# Altium PCB USBAutoMouse.PcbDoc
Units mm, origin at the board's own origin, x right, y up, seen from the top; angles counter-clockwise.
Board outline 34.02 x 58.01 mm, 2 copper layers (Top Layer, Bottom Layer); 43 components, 40 nets, 165 pads, 69 vias.
Unrouted connection lines stored in the file: 52.
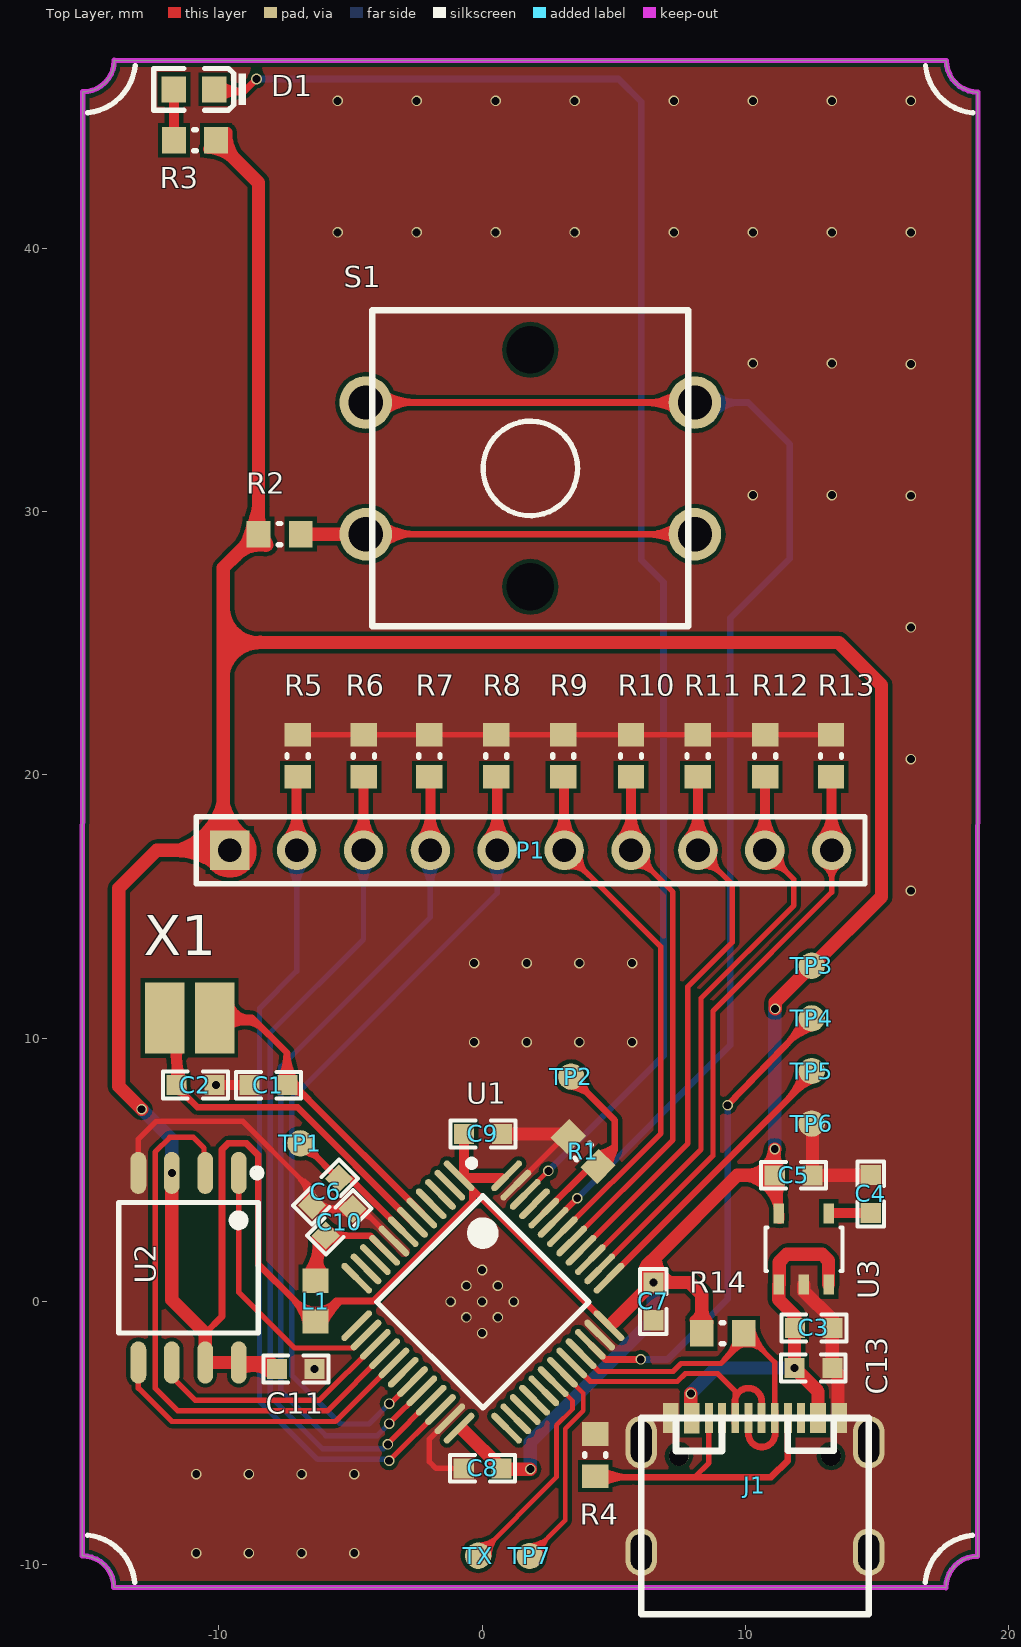
[diagram p0: Top Layer view]
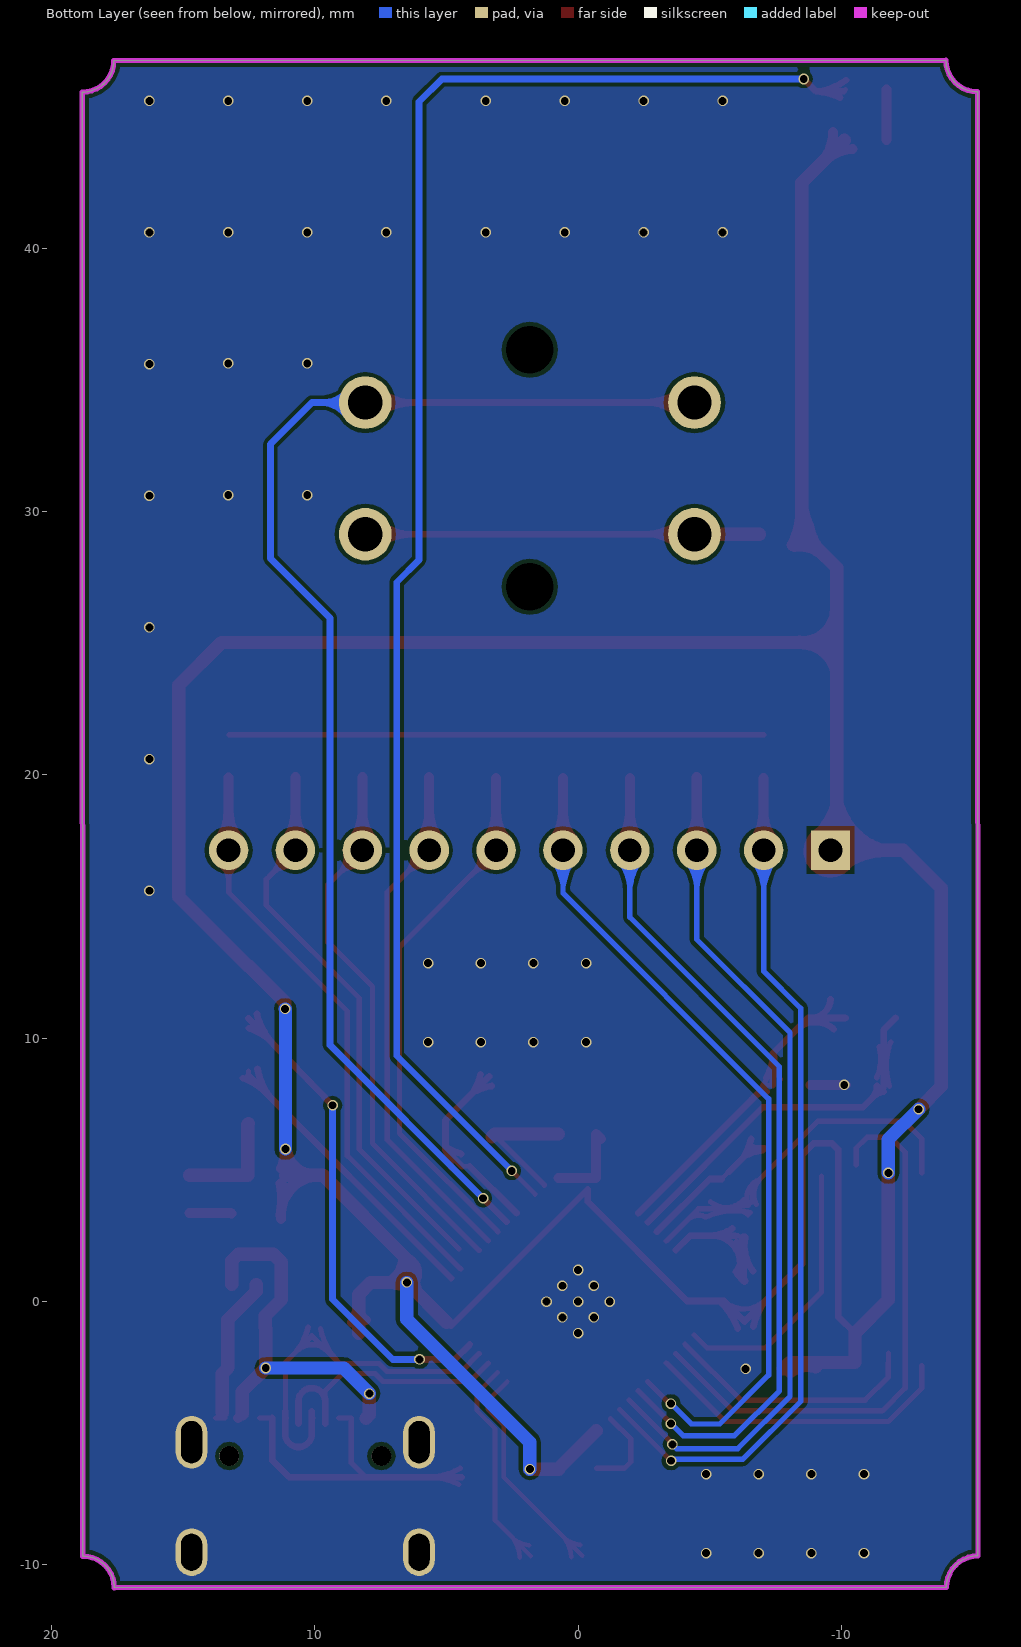
[diagram p1: Bottom Layer view, seen from below]

## Layer stack, top to bottom
Top Solder: solder mask 0.0102, Solder Resist, Dk 3.5
Top Layer: signal copper 0.0356
Dielectric 1: dielectric 0.32, FR-4, Dk 4.8
Bottom Layer: signal copper 0.0356
Bottom Solder: solder mask 0.0102, Solder Resist, Dk 3.5

## Board outline
-15.185,-9.658 cw(c-15.185,-10.858) -13.985,-10.858 17.615,-10.867 cw(c18.815,-10.867) 18.815,-9.667 18.83,45.933 cw(c18.83,47.133) 17.63,47.133 -13.97,47.142 cw(c-15.17,47.142) -15.17,45.942

## Design rules (kind name [scope] priority, off if disabled: settings)
Clearance [All] p1: gap=0.152 ignorepadtopadclearanceinfootprint=TRUE
DiffPairsRouting [All] p1: maxlimit=0.254 minlimit=0.152 mostfreqgap=0.178 toplayer_minwidth=0.152 toplayer_maxwidth=0.254 toplayer_prefwidth=0.178 bottomlayer_minwidth=0.152 bottomlayer_maxwidth=0.254 bottomlayer_prefwidth=0.178 maxuncoupledlength=12.7
MinimumSolderMaskSliver [All] p1: minsoldermaskwidth=0
PlaneConnect [All] p1: planeconnectstyle=Direct reliefexpansion=0.508 reliefentries=4 reliefconductorwidth=0.254 reliefairgap=0.254
PolygonConnect [All] p1: connectstyle=Direct reliefconductorwidth=0.254 reliefentries=4 polygonreliefangle="90 Angle" airgapwidth=0.254
RoutingVias [All] p1: holewidth=0.3 width=0.4 viastyle="Through Hole" minholewidth=0.3 minwidth=0.4 maxholewidth=0.5 maxwidth=0.6
SilkToSilkClearance [All] p1: silktosilkclearance=0
SilkToSolderMaskClearance [IsPad] p1: minsilkscreentomaskgap=0 clearancetoexposedcopper=TRUE
SolderMaskExpansion [All] p1: expansion=0.102
Width [All] p1: maxlimit=0.508 minlimit=0.178 preferedwidth=0.178
25 further rules are at their usual default settings.

## Classes and differential pairs
differential pair usb: +USB_DP -USB_DN

## Components (designator, comment, footprint, x,y, rotation, side; value= is the part's Value field where it differs from the comment)
C1 "15pF" "C 0603" -8.122,8.221 r0 top
C2 "15pF" "C 0603" -10.88,8.221 r180 top
C3 "1uF" "C 0603" 12.588,-1 r0 top
C4 "22nF" "C 0603" 14.758,4.08 r90 top
C5 "1uF" "C 0603" 11.837,4.794 r180 top
C6 "0.1uF" "C 0603" -5.943,4.169 r225 top
C7 "0.1uF" "C 0603" 6.503,0.016 r270 top
C8 "0.1uF" "C 0603" 0.026,-6.334 r180 top
C9 "0.1uF" "C 0603" 0.026,6.366 r0 top
C10 "0.1uF" "C 0603" -5.435,3.008 r45 top
C11 "0.1uF" "C 0603" -7.086,-2.557 r0 top
C13 "0.1uF" "C 0603" 12.588,-2.524 r180 top
D1 "红灯 0603" 0603_LED_S1 -10.936,46.038 r180 top
J1 "USB type C" TYPE-C-USB-17 10.694,-8.239 r0 top
L1 "4.7uH ±10%" 0603_L -6.324,0.016 r270 top
P1 "Header 10" HDR1X10 -9.585,17.142 r0 top
R1 "10K" 0603R 3.836,5.701 r315 top value=1K
R2 "4.7K" 0603R -7.692,29.147 r0 top value=1K
R3 "510" 0603R -10.906,44.108 r0 top value=1K
R4 "5.1K" 0603R 4.296,-5.828 r90 top value=1K
R5 "10K" 0603R -7.007,20.727 r270 top value=1K
R6 "10K" 0603R -4.492,20.727 r270 top value=1K
R7 "10K" 0603R -2.003,20.727 r270 top value=1K
R8 "10K" 0603R 0.537,20.727 r270 top value=1K
R9 "10K" 0603R 3.077,20.727 r270 top value=1K
R10 "10K" 0603R 5.655,20.727 r270 top value=1K
R11 "10K" 0603R 8.183,20.727 r270 top value=1K
R12 "10K" 0603R 10.748,20.727 r270 top value=1K
R13 "10K" 0603R 13.251,20.727 r270 top value=1K
R14 "1.5K" 0603R 9.135,-1.206 r0 top value=1K
S1 "KEY" KEY-12X12X7.5 1.83,31.642 r0 top locked
TP1 "NRST" TP -6.905,6.008 r0 top
TP2 "BOOT0" TP 3.38,8.545 r180 top
TP3 "3.3V" TP 12.516,12.756 r180 top
TP4 "SWDIO" TP 12.516,10.756 r180 top
TP5 "SWCLK" TP 12.516,8.756 r180 top
TP6 "GND" TP 12.516,6.756 r180 top
TP7 "RX" TP 1.804,-9.661 r90 top
TX "TX" TP -0.152,-9.652 r90 top (schematic designator TP8)
U1 "STM32F103C8T6" STM-LQFP48_L 0.026,-0.014 r315 top
U2 "W25Q32JVSSIQ" *SOIC127P790X216-8N -11.15,1.286 r270 top
U3 "RT9193-3.3v" SOT-23-5L 12.218,2 r90 top
X1 "8.000M 20pF" OSC_2SM_3R2x2R5 -11.106,10.77 r180 top

## Footprints (in the part's own frame and the unit in brackets; to place one, negate y for a bottom-side part, rotate by r counter-clockwise, add the part's x,y. Pads: shape width x height; smd on the part's side, far side on the other; paste and mask are expansions set on the pad)
0603_L [mm]
  rect 0.93x0.98 smd: 1(-0.77,0) 2(0.77,0)
  body extent -0.82,-0.41 0.83,0.41, height 0.46
0603_LED_S1 [mm]
  rect 0.93x0.98 smd: A(0.77,0) K(-0.77,0)
  silkscreen extent -1.98,-0.79 1.54,0.79, body extent -0.8,-0.4 0.8,0.4, height 0.6
0603R [mm] "Chip Resistor, Body 1.6x0.8mm, IPC Medium Density"
  rect 0.9x1 smd: 1(-0.8,0) 2(0.8,0)
  silkscreen extent -0.05,-0.4 0.05,0.4, body extent -0.85,-0.47 0.85,0.47, height 0.6
*SOIC127P790X216-8N [mm]
  oval 1.6x0.6 smd: 1(-3.6,1.905) 2(-3.6,0.635) 3(-3.6,-0.635) 4(-3.6,-1.905) 5(3.6,-1.905) 6(3.6,-0.635) 7(3.6,0.635) 8(3.6,1.905)
  silkscreen extent -3.82,-2.65 2.47,2.82
"C 0603" [mil]
  rect 30x30 smd: 1(-28,0) 2(28.5,-0.06)
  silkscreen extent -48,-20 49,20, body extent -31,-16 31,16, height 32
HDR1X10 [mm]
  rect 1.5x1.5 hole 0.9: 1(0,0)
  round 1.5 hole 0.9: 2(2.54,0) 3(5.08,0) 4(7.62,0) 5(10.16,0) 6(12.7,0) 7(15.24,0) 8(17.78,0) 9(20.32,0) 10(22.86,0)
  silkscreen extent -1.27,-1.27 24.13,1.27, body extent -1.27,-1.27 24.13,1.27, height 10.1
KEY-12X12X7.5 [mm]
  round 2 hole 1.3: 1(-6.25,2.5) 1(6.25,2.5) 2(-6.25,-2.5) 2(6.25,-2.5)
  round 0 hole 1.8: ""(0,-4.5) ""(0,4.5)
  silkscreen extent -6,-6 6,6, body extent -6.52,-5.98 6.58,5.92, height 7.3
OSC_2SM_3R2x2R5 [mm] "Crystal 8M Hz 3.2x2.5mm SMD"
  rect 1.5x2.7 smd: 1(-0.95,0) 2(0.95,0)
  body extent -1.6,-1.25 1.6,1.25, height 1
SOT-23-5L [mil]
  rect 30x16 smd: 1(-53.15,37.4) 2(-53.15,0) 3(-53.15,-37.4) 4(53.15,-37.4) 5(53.15,37.4)
  silkscreen extent -33,-58 32,57, body extent -34,-59 34,59, height 57
STM-LQFP48_L [mm] "QFP, 48-Leads, Body 7x7mm, Pitch 0.5mm, IPC High Density"
  oval 1.55x0.25 smd: 1(-4.025,2.75) 2(-4.025,2.25) 3(-4.025,1.75) 4(-4.025,1.25) 5(-4.025,0.75) 6(-4.025,0.25) 7(-4.025,-0.25) 8(-4.025,-0.75) 9(-4.025,-1.25) 10(-4.025,-1.75) 11(-4.025,-2.25) 12(-4.025,-2.75) 25(4.025,-2.75) 26(4.025,-2.25) 27(4.025,-1.75) 28(4.025,-1.25) 29(4.025,-0.75) 30(4.025,-0.25) 31(4.025,0.25) 32(4.025,0.75) 33(4.025,1.25) 34(4.025,1.75) 35(4.025,2.25) 36(4.025,2.75)
  oval 0.25x1.55 smd: 13(-2.75,-4.025) 14(-2.25,-4.025) 15(-1.75,-4.025) 16(-1.25,-4.025) 17(-0.75,-4.025) 18(-0.25,-4.025) 19(0.25,-4.025) 20(0.75,-4.025) 21(1.25,-4.025) 22(1.75,-4.025) 23(2.25,-4.025) 24(2.75,-4.025) 37(2.75,4.025) 38(2.25,4.025) 39(1.75,4.025) 40(1.25,4.025) 41(0.75,4.025) 42(0.25,4.025) 43(-0.25,4.025) 44(-0.75,4.025) 45(-1.25,4.025) 46(-1.75,4.025) 47(-2.25,4.025) 48(-2.75,4.025)
  silkscreen extent -4.15,-2.85 2.85,3.55, body extent -3.5,-3.5 3.5,3.5, height 1.6
TP [mm] "Testpoint, Surface Mounting, Circular, Pad Diameter 1mm"
  round 1 smd: 1(0,0)
TYPE-C-USB-17 [mm]
  oval 1.2x1.8 hole 0.8 slot 1.4 at 90 deg: 0(-4.653,-1.278) 0(3.987,-1.278)
  oval 1.2x2 hole 0.8 slot 1.6 at 90 deg: 0(-4.653,2.902) 0(3.987,2.902)
  rect 0.3x1.15 smd: A1(-3.683,3.815) A4(-2.883,3.813) A5(-1.583,3.817) A6(-0.583,3.817) A7(-0.083,3.815) A8(-2.083,3.817) A9(2.217,3.817) A12(3.017,3.817) B1(2.717,3.817) B4(1.917,3.817) B5(1.417,3.817) B6(0.417,3.817) B7(-1.083,3.815) B8(0.917,3.817) B9(-2.583,3.813) B12(-3.383,3.815)
  round 0.75 hole 0.75 unplated: ""(-3.223,2.372) ""(2.557,2.372)
  silkscreen extent -4.65,-3.63 3.99,3.82

## Part data
C1 C2 C3 C4 C5 C6 C7 C8 C9 C10 C11 C13: library part C, "无极性贴片电容", BOM名称=无极性, 学习资源=www.ooocke.
D1: library part "0603 红灯", "发光二极管", Package=0603, SuppliersPartNumber=C2286, ComponentLink1Description=供应商, ComponentLink1URL=http://www.szlcsc.com/product/details_2659.html, Supplier=LC
J1: library part USB_C
L1: library part "0603 4.7uH 10%", "贴片电感", Package=0603, SuppliersPartNumber=C1034, ComponentLink1Description=供应商, ComponentLink1URL=http://www.szlcsc.com/product/details_1386.html, Supplier=LC
P1: "Header, 10-Pin", LatestRevisionDate=17-Jul-2002, LatestRevisionNote="Re-released for DXP Platform.", Publisher="Altium Limited"
R1 R2 R3 R4 R5 R6 R7 R8 R9 R10 R11 R12 R13 R14: library part Res1, "Resistor", Ordered by=Subcon, Published=8-Jun-2000, Publisher="Altium Limited", Revision="July-2002: Re-released for DXP Platform."
S1: "普通轻触按钮"
TP1 TP2 TP3 TP4 TP5 TP6 TP7 TX: library part TP
U1: "ARM Cortex-M3 32-bit MCU, 64 KB Flash, 20 KB Internal RAM, 37 I/Os, 48-pin LQFP, -40 to 85 degC, Tray", I/Os (High Current)=37, Operating Frequency(F) (Processor speed) (MHz)=72, Supplier Part Number 1=497-6063-ND, Supply Voltage(Vcc) min (V)=2, A/D Converter="2x12-bit (10 Channel)", ComponentLink1Description="Manufacturer URL", ComponentLink1URL=http://www.st.com/web/en/home.html, ComponentLink2Description=Datasheet, ComponentLink2URL=http://www.st.com/st-web-ui/static/active/en/resource/technical/document/datasheet/CD00161566.pdf, ComponentLink3Description="Package Specification", ComponentLink3URL=http://www.st.com/st-web-ui/static/active/en/resource/technical/document/datasheet/DM00058181.pdf, Core="ARM Cortex-M3", DatasheetVersion="Rev. 16", FLASH Size (Prog) (kB)=64, Internal RAM Size (kB)=20, Mounting Technology="Surface Mount", PackageDescription="48-Pin Low Profile Quad Flat Package, 7 x 7 mm Body, 0.5 mm Pitch", PackageReference=LQFP48, PackageVersion="Rev. 6, 06/2013", Packing=Tray, PartNumber=STM32F103C8T6, Supplier 1=Digi-Key, Supplier 2=Farnell, Supplier 3=Newark, Supplier 4=Newark, Supplier 5=Mouser, Supplier Part Number 2=1447637, Supplier Part Number 3=59M2182, Supplier Part Number 4=57P1222, Supplier Part Number 5=511-STM32F103C8T6
U2: "NORé—ªå­˜ä¸²è¡ŒSPI 3V 32Mbit 32M x 1ä½?å¼•è„šSOIC", Package="SOIC-8 Winbond", Availability=Unavailable, MF=Winbond, MP=W25Q32JVSSIQ, Price=None, SnapEDA_Link=https://www.snapeda.com/parts/W25Q32JVSSIQ/Winbond%20Electronics/view-part/?ref=snap
U3: library part RT9193
X1: library part XTAL, "Crystal Oscillator", LatestRevisionDate=17-Jul-2002, LatestRevisionNote="Re-released for DXP Platform.", PackageReference=R38, Published=8-Jun-2000, Publisher="Altium Limited"

## Via types
v1: diameter 0.4, hole 0.3, Top Layer to Bottom Layer, tented both sides, 69 vias

## Nets (pads, with @x,y where several pads share a name; then routed paths per layer and width w, separated by ;. In a path a pad name is that pad's centre, name@x,y a point inside that pad or via, vN(x,y) a via of type N, cw(c..) or ccw(c..) an arc to the next point about the centre after c; other vN are vias at no path point)
3.3V: C5.2 C7.1 C8.1 C9.1 C11.1 L1.2 P1.1 R2.1 R3.2 R14.1 TP3.1 U1.1 U1.24 U1.36 U1.48 U2.3 U2.7 U2.8 U3.5 | length 202
  Top Layer w0.203: -9.867,23.559 cw(c-8.424,23.488) -9.826,23.835 ; -8.683,25.033 ccw(c-8.429,26.328) -8.617,25.021 ccw(c-8.429,26.328) -8.175,25.033 ; -7.124,0.067 ccw(c-6.313,0.834) -5.547,0.023
  Top Layer w0.254: -10.515,-1.203 -9.877,-0.565 -9.877,5.779 -9.648,6.008 -8.942,6.008 -8.505,5.571 -8.505,1.427 -7.108,0.03 ; L1.2@-6.65,-0.955 ccw(c-9.129,-1.508) -7.108,0.03 ; L1.2@-6.067,-1.02 cw(c-3.282,-2.118) -5.374,0.023 ; U1.36 -0.365,4.266 -0.365,3.796 -4.137,0.023 -5.374,0.023 ; 6.196,0.248 cw(c7.056,-0.729) 6.97,0.57 ; C5.2@10.875,4.535 cw(c8.683,3.252) 11.129,3.935 cw(c8.683,3.252) U3.5@11.219,3.111 ; C5.2 v1(11.113,5.795) ; 11.129,4.408 11.154,4.382 ; -7.108,0.03 L1.2 -5.547,0.023 -5.374,0.023
  Top Layer w0.381: -11.626,17.171 ccw(c-12.339,19.608) -9.826,19.241 ; -11.58,17.146 cw(c-11.719,14.61) -11.527,17.142 P1.1 P1.1@-9.826,17.383 ; -11.452,17.057 cw(c-11.644,14.524) P1.1@-10.149,16.577 ; R3.2@-10.412,43.773 cw(c-10.509,42.161) -9.277,43.205 ; -9.817,19.088 ccw(c-7.322,19.568) P1.1@-9.174,17.829 ; R3.2@-9.677,44.425 ccw(c-8.121,44.372) -8.985,43.076 ; -9.409,28.277 ccw(c-11.242,30.036) -9.327,28.367 ccw(c-11.242,30.036) -8.761,29.493 ccw(c-11.065,30.561) -8.531,30.722 ; C9.1@-0.875,6.176 C9.1 -0.685,4.699 U1.48@0.737,4.699 ; 6.1,0.42 ccw(c5.386,0.799) C7.1@6.193,0.754 ; C7.1@6.147,1.07 cw(c5.386,0.799) C7.1@6.193,0.754 ; C7.1@6.322,0.59 cw(c6.759,1.067) C7.1@6.193,0.754 ; 6.582,1.69 ccw(c6.759,1.067) C7.1@6.193,0.754 ; 6.644,1.714 ccw(c7.659,1.664) 7.265,0.727 ccw(c7.659,1.664) 7.288,0.718 ; R14.1@8.065,-0.706 ccw(c7.749,-0.252) 8.284,-0.393 ; 8.386,-0.266 ccw(c9.642,-0.08) R14.1@8.595,-0.799 ; 9.959,4.757 cw(c9.771,3.244) 11.129,3.935 cw(c9.771,3.244) U3.5@11.258,3.577 ; v1@11.148,5.823 ccw(c12.408,5.661) C5.2@11.288,5.062 ; U3.5@11.267,3.515 cw(c13.778,3.897) U3.5@11.258,3.577 ; U3.5@11.291,3.136 ccw(c9.771,3.244) U3.5@11.258,3.577 ; C5.2@11.307,4.484 ccw(c13.778,3.897) U3.5@11.258,3.577
  Top Layer w0.508: v1(-12.93,7.303) -13.798,8.171 -13.798,15.697 -12.353,17.142 -11.527,17.142 ; v1(-11.785,4.886) -11.785,0.067 -10.515,-1.203 U2.7 U2.8 -8.04,-2.314 C11.1 ; -10.766,17.235 ccw(c-12.128,19.379) -9.867,18.222 ; P1.1@-10.251,16.763 ccw(c-9.576,17.116) P1.1@-9.684,17.87 ; R3.2 -8.492,42.495 -8.492,29.766 ; P1.1@-9.826,17.383 -9.826,19.241 -9.826,23.835 -9.826,25.033 ; -9.826,26.303 ccw(c-8.507,26.347) -8.761,25.052 ; -9.819,23.964 cw(c-8.424,23.59) -8.617,25.021 cw(c-8.424,23.59) -8.495,25.033 ; -9.409,28.277 -9.339,28.347 ; -9.373,28.31 cw(c-8.439,27.51) -9.339,28.347 ; -9.327,28.367 -9.826,27.868 -9.826,25.033 ; U2.8@-9.033,-2.48 cw(c-8.695,-3.438) C11.1@-8.061,-2.644 ; R2.1@-8.516,29.171 -9.277,28.41 ; R2.1 -8.492,29.766 ; -8.492,30.214 ccw(c-5.962,29.99) -8.492,29.766 ; R2.1@-8.218,28.719 ccw(c-8.439,27.51) -9.277,28.41 ; R2.1@-8.171,28.736 cw(c-5.962,29.99) -8.492,29.766 ; -0.696,-4.901 C8.1 ; C8.1@0.737,-6.362 v1(1.833,-6.362) ; 4.984,-0.793 v1(6.503,0.727) ; R14.1 8.335,0.267 7.875,0.727 7.265,0.727 v1(6.503,0.727) ; 9.986,4.796 ccw(c10.05,5.859) 10.114,4.796 ; C5.2 10.114,4.796 ; v1(11.113,5.795) cw(c10.05,5.859) 10.114,4.796 ; v1(11.13,11.113) 11.13,11.37 TP3.1 12.543,12.756 15.168,15.381 15.168,23.407 13.542,25.033 -8.175,25.033 -8.353,25.033 ; -9.826,25.033 -8.683,25.033 -8.495,25.033 ; -9.339,28.347 cw(c-8.439,27.51) -9.277,28.41 ; -9.339,28.347 -9.277,28.41 ; -8.495,25.033 cw(c-8.424,23.59) -8.353,25.033 ; -8.495,25.033 -8.353,25.033 ; v1(6.503,0.727) 6.503,1.611 6.582,1.69 9.688,4.796 10.114,4.796
  Bottom Layer w0.508: v1(-12.93,7.303) -11.785,6.158 v1(-11.785,4.886) ; v1(1.833,-6.362) 1.833,-5.346 6.503,-0.675 v1(6.503,0.727) ; v1(11.113,5.795) 11.113,11.097 v1(11.13,11.113)
5V: C3.1 C13.2 J1.A4 J1.A9 J1.B4 J1.B9 U3.1 U3.3 | length 14.9
  Top Layer w0.381: U3.1 U3.1@11.281,0.663 ; J1.B4@12.755,-4.266 J1.A9 ; U3.3@13.156,0.663 U3.3
  Top Layer w0.508: v1(7.929,-3.492) 7.929,-4.3 J1.B9@8.055,-4.427 ; U3.1 11.268,0.077 11.877,-0.532 C3.1 11.865,-1.013 v1(11.865,-2.522) 12.755,-3.412 J1.B4@12.755,-4.266 ; U3.1@11.281,0.663 11.281,1.504 11.57,1.794 12.911,1.794 13.156,1.55 U3.3@13.156,0.663
  Bottom Layer w0.508: v1(7.929,-3.492) 8.898,-2.522 v1(11.865,-2.522)
BOOT0: R1.2 TP2.1 U1.44 | length 9.9
  Top Layer w0.178: R1.2@4.115,5.135 R1.2
  Top Layer w0.254: U1.44 R1.2@4.115,5.135 ; TP2.1@3.278,8.188 cw(c2.837,5.687) 3.95,7.97 ; TP2.1 3.986,7.938 ; TP2.1@3.707,8.623 ccw(c6.174,9.228) 3.986,7.938 ; R1.2 5.033,5.766 ; R1.2@4.441,5.608 ccw(c3.701,8.038) 4.957,5.83 ; R1.2@4.814,5.112 cw(c7.31,4.641) 5.033,5.766 ; 3.986,7.938 5.033,6.892 5.033,5.766
CC: J1.A5 J1.A8 J1.B5 J1.B8 R4.1 | length 15
  Top Layer w0.178: J1.A8 J1.A5 ; J1.B8 J1.B5
  Top Layer w0.203: R4.1@4.481,-6.336 ccw(c5.736,-4.128) 5.684,-6.667 ; R4.1@4.537,-6.946 cw(c5.702,-9.203) 5.566,-6.667 ; 5.82,-6.667 cw(c5.736,-4.128) 5.789,-6.667 ; 8.075,-6.667 8.611,-6.131 J1.A8 ; 5.684,-6.667 ccw(c5.736,-4.128) 5.789,-6.667 ; 5.684,-6.667 5.789,-6.667
  Top Layer w0.254: R4.1@4.423,-6.667 5.684,-6.667 ; 5.789,-6.667 8.075,-6.667 10.976,-6.667 11.611,-6.033 J1.B8
F_CS: U1.14 U2.1 | length 10.3
  Top Layer w0.203: U2.1@-9.245,4.759 -9.245,0.359 -7.124,-1.762 -4.903,-1.762 U1.14
GND: C1.1 C2.1 C3.2 C4.2 C5.1 C6.2 C7.2 C8.2 C9.2 C10.2 C11.2 C13.1 J1.0 J1.A1 J1.A12 J1.B1 J1.B12 R1.1 R4.2 R5.1 R6.1 R7.1 R8.1 R9.1 R10.1 R11.1 R12.1 R13.1 TP6.1 U1.8 U1.23 U1.35 U1.47 U2.4 U3.2 | length 60.6
  Top Layer w0.203: U2.4 -13.055,6.173 -12.381,6.846 -9.089,6.846 -6.87,4.627 ; R5.1@-7.057,21.527 R5.1 R6.1 R7.1 R8.1 R9.1 R10.1 R11.1 R12.1 R13.1 ; C6.2@-6.764,3.699 ccw(c-7.502,4.079) -6.884,4.632 cw(c-7.157,3.931) -6.87,4.627 ; C6.2@-6.537,3.381 cw(c-5.945,0.911) C10.2@-4.873,3.214 ; C6.2@-6.452,3.299 cw(c-5.791,2.489) -5.685,3.53 ; C6.2@-6.295,3.874 ccw(c-5.622,4.471) C10.2@-5.025,3.798 ; C10.2@-4.831,3.221 cw(c-4.576,2.661) -4.187,3.138 ; U1.8 -4.568,3.519 C10.2 -5.979,3.519 -6.118,3.658 C6.2 ; U1.23 -2.003,-5.225 -2.003,-6.082 -1.753,-6.332 C8.2 ; U1.47 3.125,6.266 R1.1 ; J1.B1 J1.A12 J1.A12@13.766,-4.422 ; -6.87,4.627 cw(c-7.157,3.931) C6.2 ; -6.87,4.627 -6.626,4.382 -6.626,3.828 C6.2
  Top Layer w0.381: C2.1 C1.1
  Top Layer w0.508: C9.2 3.173,6.364 R1.1 ; U3.2 12.218,0.398 13.312,-0.697 C3.2 13.3,-1.014 C13.1 13.517,-2.741 J1.B1@13.517,-4.228 ; TP6.1 12.548,6.724 C5.1 14.75,4.794 C4.2
  other v1: -10.858,-9.553 -8.858,-9.553 -6.858,-9.553 -4.858,-9.553 -10.858,-6.553 -8.858,-6.553 -6.858,-6.553 -4.858,-6.553 -6.362,-2.558 0,-1.2 -0.6,-0.6 0.6,-0.6 -1.2,0 0,0 1.2,0 -0.6,0.6 0.6,0.6 0,1.2 -10.109,8.23 -0.305,9.855 1.695,9.855 3.695,9.855 5.695,9.855 -0.305,12.855 1.695,12.855 3.695,12.855 5.695,12.855 16.285,15.603 16.285,20.603 16.285,25.603 16.285,30.603 10.285,30.63 13.285,30.63 16.285,35.603 10.285,35.63 13.285,35.63 -5.491,40.603 -2.491,40.603 0.509,40.603 3.509,40.603 7.285,40.603 10.285,40.603 13.285,40.603 16.285,40.603 -5.491,45.603 -2.491,45.603 0.509,45.603 3.509,45.603 7.285,45.603 10.285,45.603 13.285,45.603 16.285,45.603
MISO: U1.16 U2.2 | length 21.8
  Top Layer w0.203: U2.2@-10.563,5.195 -10.563,5.83 -10.969,6.237 -11.858,6.237 -12.42,5.675 -12.42,-3.286 -11.556,-4.15 -5.877,-4.15 U1.16
MOSI: U1.17 U2.5 | length 12
  Top Layer w0.203: U2.5@-13.055,-2.441 -13.055,-3.286 -11.785,-4.556 -5.576,-4.556 U1.17
NetC1_2: C1.2 U1.5 X1.1 | length 18.2
  Top Layer w0.178: C1.2 C1.2@-7.147,8.219
  Top Layer w0.203: C1.2@-7.674,8.441 ccw(c-9.988,9.487) -7.448,9.492 ; -7.382,9.3 ccw(c-4.866,9.646) C1.2@-7.124,8.484 ; -7.27,8.738 ccw(c-4.867,9.56) -6.624,7.726
  Top Layer w0.254: X1.1 -8.738,10.77 -7.398,9.43 C1.2 ; X1.1@-9.709,10.338 cw(c-9.01,9.614) -8.286,10.312 ; X1.1@-9.585,11.481 ccw(c-8.84,11.515) -8.806,10.77 ; C1.2@-7.159,7.966 cw(c-7.172,7.248) -6.773,7.845 ; C1.2@-7.147,8.219 -6.773,7.845 ; -6.594,7.674 ccw(c-7.172,7.248) -6.773,7.845 ; U1.5 -6.773,7.845
NetC2_2: C2.2 U1.6 X1.2 | length 17.6
  Top Layer w0.203: X1.2@-11.868,9.855 cw(c-14.243,8.957) C2.2@-11.825,8.182 ; X1.2@-11.435,9.673 ccw(c-9.76,9.225) C2.2@-11.337,8.504
  Top Layer w0.254: X1.2 -11.604,10.318 C2.2 ; C2.2@-11.629,8.192 -11.249,7.812 ; C2.2@-11.603,7.966 cw(c-11.623,7.436) -11.249,7.812 ; C2.2@-11.35,8.192 ccw(c-10.731,8.179) -11.219,7.798 ; U1.6 -7.014,7.38 -10.817,7.38 -11.249,7.812
NetC4_1: C4.1 U3.4 | length 1.6
  Top Layer w0.381: U3.4 13.178,3.359 14.749,3.359 C4.1
NetD1_A: D1.A R3.1 | length 1.9
  Top Layer w0.381: R3.1 D1.A
NetR2_2: R2.2 S1.2 | length 20.2
  Top Layer w0.203: R2.2 R2.2@-6.887,29.142 ; S1.2@-3.984,28.548 cw(c-2.319,26.629) -2.689,29.142 ; S1.2@-3.673,29.476 ccw(c-2.467,31.712) -2.536,29.173 ; 6.278,29.117 cw(c6.209,26.578) S1.2@7.414,28.814 ; 6.43,29.147 ccw(c6.061,31.66) S1.2@7.726,29.742
  Top Layer w0.254: S1.2@-4.42,29.142 S1.2@8.08,29.142
  Top Layer w0.508: R2.2@-6.887,29.142 S1.2@-4.42,29.142
NRST: C6.1 TP1.1 U1.7 | length 6.9
  Top Layer w0.178: TP1.1@-7.086,5.858 TP1.1@-6.653,5.858 ; C6.1@-5.721,4.926 C6.1@-5.453,4.658
  Top Layer w0.254: TP1.1@-7.004,5.75 cw(c-7.445,3.249) -6.331,5.531 ; TP1.1@-6.653,5.858 -6.295,5.5 ; TP1.1@-6.574,6.185 ccw(c-4.107,6.79) -6.295,5.5 ; C6.1@-5.721,4.926 -6.295,5.5 ; C6.1@-5.453,4.658 -5,4.658 U1.7
PA8: U1.29
PA9: TX.1 U1.30 | length 9.7
  Top Layer w0.178: TX.1 2.823,-6.677 2.823,-4.696 3.433,-4.087 3.433,-3.775 U1.30 ; TX.1@-0.083,-9.245 ccw(c-0.308,-7.825) 0.461,-9.039 ; TX.1@0.261,-9.703 cw(c1.711,-9.796) 0.486,-9.014
PA10: TP7.1 U1.31 | length 9.5
  Top Layer w0.178: TP7.1 3.153,-8.312 3.153,-4.833 3.839,-4.147 3.839,-3.474 U1.31 ; TP7.1@1.868,-9.259 ccw(c1.643,-7.839) 2.411,-9.054 ; TP7.1@2.211,-9.717 cw(c3.661,-9.811) 2.437,-9.029
PA13: TP4.1 U1.34 | length 20.6
  Top Layer w0.254: U1.34 4.683,-2.196 v1(6.024,-2.196) ; v1(9.326,7.457) TP4.1 ; 11.584,9.793 ccw(c9.732,11.53) TP4.1@12.199,10.926 ; 11.698,9.928 cw(c13.319,7.972) TP4.1@12.501,10.377
  Bottom Layer w0.254: v1(6.024,-2.196) 7.04,-2.196 9.326,0.09 v1(9.326,7.457)
PA14: TP5.1 U1.37 | length 13.6
  Top Layer w0.178: TP5.1@12.516,8.587 TP5.1
  Top Layer w0.254: U1.37 TP5.1@12.516,8.587 ; 11.643,7.712 cw(c13.611,6.105) TP5.1@12.724,8.486 ; 11.713,7.784 ccw(c9.681,9.307) TP5.1@12.176,8.833
PA15: P1.10 R13.2 U1.38 | length 25.9
  Top Layer w0.178: U1.38 U1.38@4.463,1.254 ; R13.2 R13.2@13.275,19.904
  Top Layer w0.203: U1.38 8.767,5.544 8.767,11.037 13.275,15.545 P1.10 ; P1.10@12.947,16.564 cw(c12.594,15.962) 13.275,16.117 ; 13.275,16.009 cw(c13.913,16.021) P1.10@13.644,16.6
  Top Layer w0.381: P1.10@12.902,17.6 ccw(c11.758,18.587) 13.266,18.492 ; P1.10 R13.2@13.275,19.904 ; 13.275,18.606 ccw(c15.003,18.606) P1.10@13.718,17.451
PB0: U1.18
PB1: P1.5 R8.2 U1.19 | length 36.2
  Top Layer w0.203: v1(-3.527,-3.873) -3.478,-3.873 U1.19 ; R8.2 R8.2@0.575,19.89
  Top Layer w0.381: P1.5@0.202,17.574 ccw(c-0.942,18.562) 0.566,18.467 ; P1.5 0.575,18.581 ; R8.2@0.575,19.89 0.575,18.581 ; P1.5@1.018,17.425 cw(c2.303,18.581) 0.575,18.581
  Bottom Layer w0.203: v1(-3.527,-3.873) -4.302,-4.648 -5.378,-4.648 -7.235,-2.791 -7.235,7.7 0.575,15.51 0.575,15.822 ; P1.5@0.242,16.703 cw(c-2.075,15.355) 0.575,15.762 ; 0.574,15.818 cw(c2.764,15.508) 0.575,15.822 ; P1.5 0.575,15.822 ; P1.5@0.918,16.727 ccw(c2.764,15.508) 0.575,15.822
PB2: P1.4 R7.2 U1.20 | length 36.7
  Top Layer w0.178: R7.2 R7.2@-1.965,19.89
  Top Layer w0.203: v1@-3.53,-4.631 U1.20
  Top Layer w0.381: P1.4@-2.338,17.549 ccw(c-3.482,18.537) -1.974,18.441 ; P1.4 -1.965,18.556 ; R7.2@-1.965,19.89 -1.965,18.556 ; P1.4@-1.522,17.4 cw(c-0.237,18.556) -1.965,18.556
  Bottom Layer w0.203: v1(-3.527,-4.635) -3.984,-5.092 -5.94,-5.092 -7.642,-3.39 -7.642,8.919 -1.965,14.595 -1.965,15.796 ; P1.4@-2.298,16.678 cw(c-4.615,15.329) -1.965,15.736 ; -1.966,15.793 cw(c0.224,15.483) -1.965,15.796 ; P1.4 -1.965,15.796 ; P1.4@-1.622,16.701 ccw(c0.224,15.483) -1.965,15.796
PB3: P1.9 R12.2 U1.39 | length 25.6
  Top Layer w0.203: U1.39@4.525,1.995 8.31,5.779 8.31,11.52 11.84,15.05 11.84,16.037 P1.9 ; R12.2@10.735,19.914 R12.2 ; P1.9@10.738,16.491 cw(c10.982,15.614) 11.688,16.189 ; P1.9@11.389,17.138 ccw(c12.219,16.885) 11.55,16.331
  Top Layer w0.381: P1.9@10.362,17.574 ccw(c9.218,18.562) 10.726,18.467 ; P1.9 R12.2@10.735,19.914 ; 10.735,18.581 ccw(c12.463,18.581) P1.9@11.178,17.425
PB4: P1.8 R11.2 U1.40 | length 25.1
  Top Layer w0.203: U1.40 7.811,6.003 7.811,11.961 9.503,13.653 9.503,15.834 P1.8 ; R11.2 R11.2@8.195,19.915 ; P1.8@8.198,16.491 cw(c8.442,15.614) 9.148,16.189 ; P1.8@8.849,17.138 ccw(c9.679,16.885) 9.01,16.331
  Top Layer w0.381: P1.8@7.822,17.574 ccw(c6.678,18.562) 8.186,18.467 ; P1.8 R11.2@8.195,19.915 ; 8.195,18.581 ccw(c9.923,18.581) P1.8@8.638,17.425
PB5: P1.7 R10.2 U1.41 | length 24
  Top Layer w0.203: U1.41 7.243,6.142 7.243,15.554 P1.7 ; P1.7@5.654,16.495 cw(c5.898,15.618) 6.604,16.193 ; P1.7@6.304,17.142 ccw(c7.135,16.889) 6.466,16.335
  Top Layer w0.381: P1.7@5.282,17.574 ccw(c4.138,18.562) 5.646,18.467 ; P1.7 R10.2 ; 5.655,18.581 ccw(c7.383,18.581) P1.7@6.098,17.425
PB6: P1.6 R9.2 U1.42 | length 24.5
  Top Layer w0.203: U1.42 6.786,6.391 6.786,13.471 P1.6 ; R9.2 R9.2@3.115,19.89 ; P1.6@3.113,16.486 cw(c3.357,15.609) 4.062,16.185 ; P1.6@3.763,17.133 ccw(c4.594,16.88) 3.925,16.327
  Top Layer w0.381: P1.6@2.742,17.574 ccw(c1.598,18.562) 3.106,18.467 ; P1.6 R9.2@3.115,19.89 ; 3.115,18.581 ccw(c4.843,18.581) P1.6@3.558,17.425
PB7: S1.1 U1.43 | length 57.9
  Top Layer w0.203: S1.1@-3.984,33.548 cw(c-2.319,31.629) -2.689,34.142 ; S1.1@-3.673,34.476 ccw(c-2.467,36.712) -2.536,34.173 ; 6.227,34.112 cw(c6.158,31.573) S1.1@7.363,33.809 ; 6.379,34.142 ccw(c6.01,36.655) S1.1@7.675,34.737
  Top Layer w0.254: S1.1@-4.42,34.142 S1.1@8.08,34.142 ; U1.43@2.719,3.034 v1(3.611,3.925)
  Bottom Layer w0.203: S1.1@8.681,33.478 cw(c9.863,32.749) 9.83,34.138 ; S1.1@8.687,34.671 ccw(c9.741,35.496) 9.828,34.16
  Bottom Layer w0.254: v1(3.611,3.925) 9.423,9.738 9.423,25.959 11.684,28.219 11.684,32.563 10.104,34.142 S1.1@8.08,34.142
PB8: U1.45
PB9: D1.K U1.46 | length 62.8
  Top Layer w0.178: D1.K D1.K@-10.089,45.962 ; U1.46 1.635,4.083 v1(2.518,4.967)
  Top Layer w0.254: D1.K@-10.175,46.386 ccw(c-8.702,48.455) -9.191,45.962 ; D1.K@-10.089,45.962 -9.191,45.962 ; D1.K@-9.949,45.726 cw(c-8.866,43.428) -9.039,45.962 ; v1(-8.57,46.431) -9.039,45.962 ; -9.191,45.962 -9.039,45.962
  Bottom Layer w0.254: v1(-8.57,46.431) 5.176,46.431 6.041,45.566 6.041,28.165 6.887,27.319 6.887,9.335 v1(2.518,4.967)
PB10: P1.3 R6.2 U1.21 | length 37
  Top Layer w0.178: v1(-3.578,-5.422) v1@-3.578,-5.386
  Top Layer w0.203: R6.2@-4.505,19.914 R6.2 ; v1@-3.578,-5.386 U1.21
  Top Layer w0.381: P1.3@-4.878,17.574 ccw(c-6.022,18.562) -4.514,18.467 ; P1.3 -4.505,18.581 ; R6.2@-4.505,19.914 -4.505,18.581 ; P1.3@-4.062,17.425 cw(c-2.777,18.581) -4.505,18.581
  Bottom Layer w0.203: P1.3@-4.838,16.678 cw(c-7.155,15.329) -4.505,15.736 ; -4.506,15.793 cw(c-2.316,15.483) -4.505,15.796 ; P1.3 -4.505,15.796 ; P1.3@-4.162,16.701 ccw(c-2.316,15.483) -4.505,15.796 ; v1(-3.578,-5.422) -3.744,-5.588 -6.059,-5.588 -8.048,-3.599 -8.048,10.215 -4.505,13.757 -4.505,15.796
PB11: P1.2 R5.2 U1.22 | length 37.2
  Top Layer w0.203: R5.2@-7.045,19.888 R5.2 ; v1(-3.531,-6.046) U1.22
  Top Layer w0.381: P1.2@-7.41,17.561 ccw(c-8.553,18.549) -7.045,18.454 ; P1.2 R5.2@-7.045,19.888 ; -7.037,18.568 ccw(c-5.309,18.568) P1.2@-6.594,17.413
  Bottom Layer w0.203: P1.2@-7.378,16.652 cw(c-9.695,15.304) -7.045,15.711 ; -7.046,15.767 cw(c-4.856,15.457) -7.045,15.771 ; P1.2 -7.045,15.771 ; P1.2@-6.702,16.676 ccw(c-4.856,15.457) -7.045,15.771 ; v1(-3.531,-6.046) -3.582,-5.994 -6.249,-5.994 -8.454,-3.789 -8.454,11.139 -7.045,12.548 -7.045,15.771
PB12: U1.25
PB13: U1.26
PB14: U1.27
PB15: U1.28
SCK: U1.15 U2.6 | length 9.9
  Top Layer w0.178: U2.6 U2.6@-11.785,-1.941
  Top Layer w0.203: U2.6 -11.785,-2.863 -10.903,-3.744 -6.179,-3.744 U1.15
USB_DN: J1.A7 J1.B7 U1.32 | length 11.3
  Top Layer w0.203: U1.32 4.11,-3.037 7.411,-3.037 7.718,-2.73 8.945,-2.73 9.611,-3.396 9.611,-3.705 J1.B7 ; J1.B7@9.572,-4.492 J1.B7@9.572,-4.424
  Top Layer w0.254: J1.B7@9.603,-4.633 9.603,-3.794 cw(c10.111,-3.794) 9.611,-3.705 cw(c10.111,-3.794) 10.619,-3.794 J1.A7@10.619,-4.633
USB_DP: J1.A6 J1.B6 R14.2 U1.33 | length 18.6
  Top Layer w0.203: U1.33 4.436,-2.656 7.253,-2.656 7.56,-2.349 9.066,-2.349 10.111,-1.303 11.111,-2.303 J1.B6 ; 9.167,-2.237 ccw(c7.294,-0.521) R14.2@9.783,-1.028 ; 9.258,-2.126 cw(c11.111,-3.863) R14.2@9.935,-1.612 ; 9.478,-1.891 cw(c10.089,-2.5) 10.697,-1.889 cw(c12.71,-0.34) R14.2@10.25,-0.971
  Top Layer w0.254: J1.A6@10.103,-4.431 J1.A6 ; J1.A6@10.111,-4.177 10.111,-5.016 ccw(c10.619,-5.016) 11.127,-5.016 J1.B6@11.127,-4.176 ; J1.B6 J1.B6@11.119,-4.43
VDDA: C10.1 L1.1 U1.9 | length 9.8
  Top Layer w0.203: C10.1@-6.067,2.506 C10.1 ; C10.1@-6.014,2.302 ccw(c-5.137,1.754) L1.1@-5.959,1.126
  Top Layer w0.254: L1.1@-6.643,1.159 ccw(c-7.919,2.133) C10.1@-6.345,2.45 ; L1.1@-6.147,1.235 cw(c-5.076,1.423) -4.975,2.506 ; C10.1 -4.262,2.506 U1.9 ; C10.1@-5.85,2.775 ccw(c-4.978,4.025) -5.1,2.506
  Top Layer w0.305: L1.1 L1.1@-6.067,1.043 ; L1.1@-6.27,0.979 C10.1@-6.27,2.441
pads on no net: J1. S1. U1.2 U1.3 U1.4 U1.10 U1.11 U1.12 U1.13

## Polygon pours and split planes (outlines as drawn)
GND on Top Layer "Top Layer-No Net" (solid, remove dead copper, pour order 22): -15.185,-9.658 cw(c-15.185,-10.858) -13.985,-10.858 17.615,-10.867 cw(c18.815,-10.867) 18.815,-9.667 18.83,45.933 cw(c18.83,47.133) 17.63,47.133 -13.97,47.142 cw(c-15.17,47.142) -15.17,45.942
GND on Bottom Layer "Top Layer-No Net1" (solid, remove dead copper, pour order 23): -15.185,-9.658 cw(c-15.185,-10.858) -13.985,-10.858 17.615,-10.867 cw(c18.815,-10.867) 18.815,-9.667 18.83,45.933 cw(c18.83,47.133) 17.63,47.133 -13.97,47.142 cw(c-15.17,47.142) -15.17,45.942

## Keep-outs
Keep-Out Layer:
  the board outline again, w0.203

## Silkscreen, mask and mechanical layers (free items; w line width, h text height)
Top Overlay:
  lines w0.203: -14.986,-8.868 cw(c-15.185,-10.858) -13.195,-10.667 ; -14.979,45.152 ccw(c-15.17,47.142) -13.179,46.943 ; 16.825,-10.668 cw(c18.815,-10.867) 18.624,-8.876 ; 16.84,46.942 ccw(c18.83,47.133) 18.631,45.143